# Altium PCB gclk_usb.PcbDoc
Units mil, origin at the board's own origin, x right, y up, seen from the top; angles counter-clockwise.
Board outline 2400 x 1500 mil, 2 copper layers (Top Layer, Bottom Layer), stack 61.855 mil thick; 39 components, 45 nets, 123 pads, 0 vias.
Unrouted connection lines stored in the file: 72.
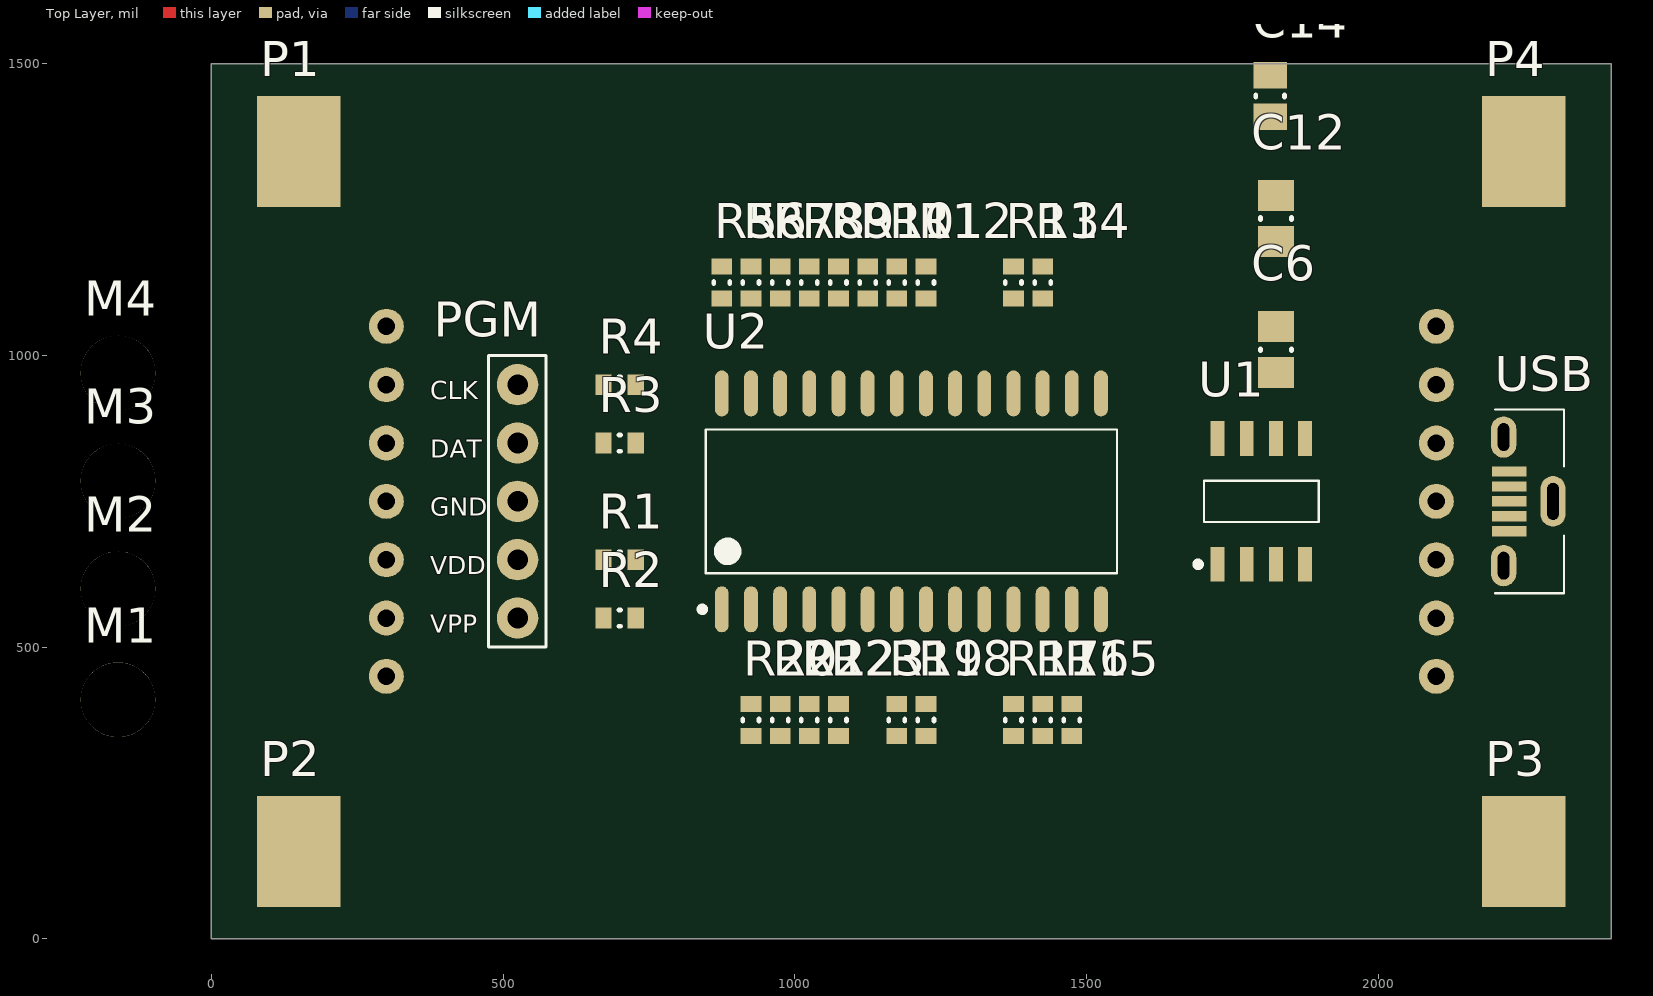
[diagram p0: Top Layer view]
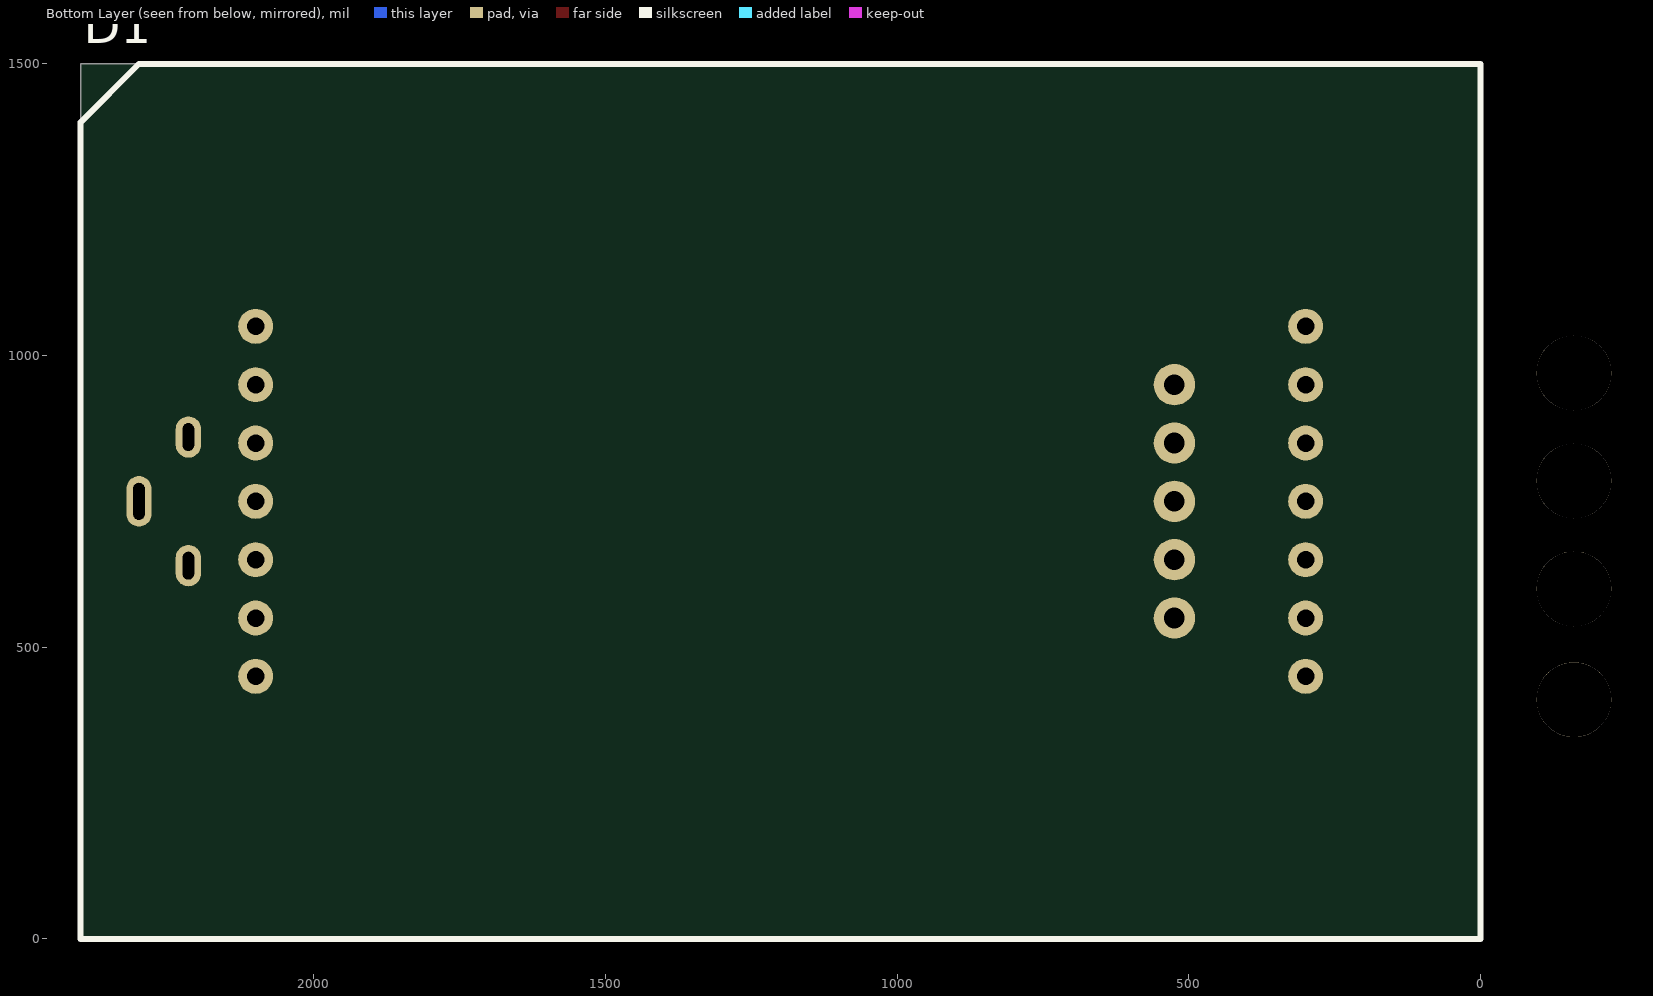
[diagram p1: Bottom Layer view, seen from below]

## Layer stack, top to bottom
Top Layer: signal copper 1.4
Dielectric: core 59.0551, FR-4, Dk 4.8
Bottom Layer: signal copper 1.4

## Board outline
0,0 2400,0 2400,1500 0,1500

## Design rules (kind name [scope] priority, off if disabled: settings)
Clearance [All] p1: gap=10
ComponentClearance ComponentClearance_LED [InComponent('D1')] p1: gap=0 collisioncheckmode=3 verticalgap=0 showdistances=FALSE
ComponentClearance [All] p2: gap=10 collisioncheckmode=3 verticalgap=10 showdistances=FALSE
PolygonConnect [All] p1: connectstyle=Relief reliefconductorwidth=10 reliefentries=4 polygonreliefangle="90 Angle" airgapwidth=10
RoutingVias [All] p1: holewidth=28 width=50 viastyle="Through Hole" minholewidth=28 minwidth=50 maxholewidth=28 maxwidth=50
SolderMaskExpansion [All] p1: expansion=4
Width [All] p1: maxlimit=10 minlimit=10 preferedwidth=10
27 further rules are at their usual default settings.

## Components (designator, comment, footprint, x,y, rotation, side; value= is the part's Value field where it differs from the comment)
C6 "CAP 100nF 50V 0805(2012)" CAPC0805(2012)145_M 1825,1010 r90 top
C12 "CAP 100nF 50V 0805(2012)" CAPC0805(2012)145_M 1825,1235 r90 top
C14 "CAP 100nF 50V 0805(2012)" CAPC0805(2012)145_N 1815,1445 r90 top
D1 "LED Array" LTP-2158 1200,750 r270 bottom locked
M1 "HOLE128.3-128.3-NP" HOLE128.3-128.3-NP -160,410 r90 top
M2 "HOLE128.3-128.3-NP" HOLE128.3-128.3-NP -160,600 r90 top
M3 "HOLE128.3-128.3-NP" HOLE128.3-128.3-NP -160,785 r90 top
M4 "HOLE128.3-128.3-NP" HOLE128.3-128.3-NP -160,970 r90 top
P1 "PAD143-190-12GA" PAD143-190-12GA 150,1350 r90 top
P2 "PAD143-190-12GA" PAD143-190-12GA 150,150 r90 top
P3 "PAD143-190-12GA" PAD143-190-12GA 2250,150 r90 top
P4 "PAD143-190-12GA" PAD143-190-12GA 2250,1350 r90 top
PGM "Program Header" ProgHeader_100 525,550 r90 top
R1 "1K" RESC0603(1608)_L 700,650 r180 top
R2 "1K" RESC0603(1608)_L 700,550 r0 top
R3 "1K" RESC0603(1608)_L 700,850 r0 top
R4 "1K" RESC0603(1608)_L 700,950 r0 top
R5 "100R" RESC0603(1608)_L 875,1125 r90 top
R6 "100R" RESC0603(1608)_L 925,1125 r90 top
R7 "100R" RESC0603(1608)_L 975,1125 r90 top
R8 "100R" RESC0603(1608)_L 1025,1125 r90 top
R9 "100R" RESC0603(1608)_L 1075,1125 r90 top
R10 "100R" RESC0603(1608)_L 1125,1125 r90 top
R11 "100R" RESC0603(1608)_L 1175,1125 r90 top
R12 "100R" RESC0603(1608)_L 1225,1125 r90 top
R13 "100R" RESC0603(1608)_L 1375,1125 r90 top
R14 "100R" RESC0603(1608)_L 1425,1125 r90 top
R15 "100R" RESC0603(1608)_L 1475,375 r270 top
R16 "100R" RESC0603(1608)_L 1425,375 r270 top
R17 "100R" RESC0603(1608)_L 1375,375 r270 top
R18 "100K" RESC0603(1608)_L 1225,375 r90 top
R19 "100K" RESC0603(1608)_L 1175,375 r270 top
R20 "100R" RESC0603(1608)_L 925,375 r90 top
R21 "100R" RESC0603(1608)_L 975,375 r90 top
R22 "100R" RESC0603(1608)_L 1025,375 r90 top
R23 "100R" RESC0603(1608)_L 1075,375 r90 top
U1 "L78L33" NCV78L00A 1800,750 r90 top
U2 "PIC18F26J53 SOIC" "Microchip SOIC 28 Wide" 1200,750 r90 top
USB "USB" 105133-0001 2300,750 r90 top

## Footprints (in the part's own frame and the unit in brackets; to place one, negate y for a bottom-side part, rotate by r counter-clockwise, add the part's x,y. Pads: shape width x height; smd on the part's side, far side on the other; paste and mask are expansions set on the pad)
105133-0001 [mm] "Micro USB B Receptacle Vertical Type"
  oval 1.8x1.1 hole 0.5 slot 1.2 at 0 deg: 0(-2.8,2.15) 0(2.8,2.15)
  oval 2.2x1.1 hole 0.5 slot 1.6 at 0 deg: 0(0,0)
  rect 0.45x1.5 smd: 1(-1.3,1.9) 2(-0.65,1.9) 3(0,1.9) 4(0.65,1.9) 5(1.3,1.9)
  silkscreen extent -4,-0.48 4,2.52, body extent -4.05,-0.53 4.05,2.57, height 6.7
CAPC0805(2012)145_M [mm] "Chip Capacitor, Body 2.0x1.2mm, Height 1.45mm, IPC Low Density"
  rect 1.35x1.55 smd: 1(-1,0) 2(1,0)
  silkscreen extent -0.05,-0.67 0.05,0.67, body extent -1.1,-0.72 1.1,0.72, height 1.45
CAPC0805(2012)145_N [mm] "Chip Capacitor, Body 2.0x1.2mm, Height 1.45mm, IPC Medium Density"
  rect 1.15x1.45 smd: 1(-0.9,0) 2(0.9,0)
  silkscreen extent -0.05,-0.62 0.05,0.63, body extent -1.1,-0.72 1.1,0.73, height 1.45
HOLE128.3-128.3-NP [mil]
  round 128.3 hole 128.3 unplated: 1(0,0)
LTP-2158 [mil] "LED Matrix 5x8 2.3\" Hi Effeciency Red"
  round 60 hole 30: 1(-300,-900) 2(-200,-900) 3(-100,-900) 4(0,-900) 5(100,-900) 6(200,-900) 7(300,-900) 8(300,900) 9(200,900) 10(100,900) 11(0,900) 12(-100,900) 13(-200,900) 14(-300,900)
  silkscreen extent -750,-1200 750,1200, body extent -750,-1200 750,1200, height 352
"Microchip SOIC 28 Wide" [mm] "SOIC, 28-Leads, Body 17.90x7.50mm, Pitch 1.27mm, IPC Medium Density"
  oval 2x0.6 smd: 1(-4.7,8.255) 2(-4.7,6.985) 3(-4.7,5.715) 4(-4.7,4.445) 5(-4.7,3.175) 6(-4.7,1.905) 7(-4.7,0.635) 8(-4.7,-0.635) 9(-4.7,-1.905) 10(-4.7,-3.175) 11(-4.7,-4.445) 12(-4.7,-5.715) 13(-4.7,-6.985) 14(-4.7,-8.255) 15(4.7,-8.255) 16(4.7,-6.985) 17(4.7,-5.715) 18(4.7,-4.445) 19(4.7,-3.175) 20(4.7,-1.905) 21(4.7,-0.635) 22(4.7,0.635) 23(4.7,1.905) 24(4.7,3.175) 25(4.7,4.445) 26(4.7,5.715) 27(4.7,6.985) 28(4.7,8.255)
  silkscreen extent -4.82,-8.95 3.13,9.23, body extent -3.75,-8.95 3.75,8.95, height 2.65
NCV78L00A [mm] "SOIC, 8-Leads, Body 4.90x3.90mm, Pitch 1.27mm, IPC Medium Density"
  rect 1.52x0.6 smd: 1(-2.74,1.905) 2(-2.74,-0.635) 2(-2.74,0.635) 2(2.74,-0.635) 2(2.74,0.635) 4(-2.74,-1.905) 5(2.74,-1.905) 8(2.74,1.905)
  silkscreen extent -2.86,-2.5 0.9,2.88, body extent -2,-2.5 2,2.5, height 1.75
PAD143-190-12GA [mil]
  rect 190x143 smd: 1(0,0)
ProgHeader_100 [mm] "Programming Header, 5 Position, 0.100\" centres"
  round 1.8 hole 0.9: 1(0,0) 2(2.54,0) 3(5.08,0) 4(7.62,0) 5(10.16,0)
  silkscreen extent -1.27,-1.23 11.43,1.27, body extent -1.27,-1.23 11.43,1.27, height 5.08
RESC0603(1608)_L [mm] "Chip Resistor, Body 1.6x0.8mm, IPC High Density"
  rect 0.7x0.9 smd: 1(-0.7,0) 2(0.7,0)
  silkscreen extent -0.05,-0.35 0.05,0.35, body extent -0.85,-0.47 0.85,0.47, height 0.6

## Part data
C6 C12 C14: library part CMP-1036-04422-1, "CAP 100nF 50V ±20% 0805 (2012 Metric) Thickness 1.45mm SMD"
D1: library part LTP-2158, "LED Matrix 5x8 2.3\" Hi Effeciency Red"
PGM: library part ProgHeader_100, "Programming header, 0.100\" centres"
R1 R2 R3 R4: library part CMP-1012-00510-1, "1K 0.1W 1% 0603 (1608 Metric)  SMD"
R5 R6 R7 R8 R9 R10 R11 R12 R13 R14 R15 R16 R17 R20 R21 R22 R23: library part CMP-1012-00397-1, "100R 0.1W 1% 0603 (1608 Metric)  SMD"
R18 R19: library part CMP-1012-00736-1, "100K 0.1W 1% 0603 (1608 Metric)  SMD"
U1: library part NCV78L05A, "5V, 100mA Positive Voltage Regulator"
USB: library part 105133-0001, "Micro USB B Receptacle Vertical Type"

## Nets (pads, with @x,y where several pads share a name; then routed paths per layer and width w, separated by ;. In a path a pad name is that pad's centre, name@x,y a point inside that pad or via, vN(x,y) a via of type N, cw(c..) or ccw(c..) an arc to the next point about the centre after c; other vN are vias at no path point)
CLK: PGM.5 R4.2
D+: U2.16 USB.3
D-: U2.15 USB.2
DAT: PGM.4 R3.2
GND: C6.1 C12.1 C14.1 M1.1 M2.1 M3.1 M4.1 PGM.3 R19.2 U1.2 U2.8 U2.19 USB.0 USB.5
MCLR: R2.1 U2.1
NetD1_1: D1.1 R10.2
NetD1_2: D1.2 R12.2
NetD1_3: D1.3 R14.2
NetD1_5: D1.5 R9.2
NetD1_6: D1.6 R17.2
NetD1_7: D1.7 R11.2
NetD1_8: D1.8 R7.2
NetD1_9: D1.9 R5.2
NetD1_10: D1.10 R16.2
NetD1_11: D1.11 R15.2
NetD1_12: D1.12 R8.2
NetD1_13: D1.13 R13.2
NetD1_14: D1.14 R6.2
NetP1_1: P1.1 R20.1
NetP2_1: P2.1 R21.1
NetP3_1: P3.1 R22.1
NetP4_1: P4.1 R23.1
NetR7_1: R7.1 U2.26
NetR8_1: R8.1 U2.25
NetR9_1: R9.1 U2.24
NetR10_1: R10.1 U2.23
NetR11_1: R11.1 U2.22
NetR12_1: R12.1 U2.21
NetR13_1: R13.1 U2.18
NetR14_1: R14.1 U2.17
NetR15_1: R15.1 U2.13
NetR16_1: R16.1 U2.12
NetR17_1: R17.1 U2.11
NetR18_2: R18.2 R19.1 U2.7
NetR20_2: R20.2 U2.2
NetR21_2: R21.2 U2.3
NetR22_2: R22.2 U2.4
NetR23_2: R23.2 U2.5
PGC: R4.1 R6.1 U2.27
PGD: R3.1 R5.1 U2.28
VCORE: C14.2 U2.6
VDD: C12.2 PGM.2 R1.2 U1.1 U2.14 U2.20
VPP: PGM.1 R1.1 R2.2
VUSB: C6.2 R18.1 U1.8 USB.1
pads on no net: D1.4 U1.4 U1.5 U2.9 U2.10 USB.4

## Text inside footprints (layer, text, board x,y; h text height)
PGM: Top Overlay "CLK" at 375,925 h31.5; Top Overlay "DAT" at 375,825 h31.5; Top Overlay "GND" at 375,725 h31.5; Top Overlay "VDD" at 375,625 h31.5; Top Overlay "VPP" at 375,525 h31.5